# Altium PCB PCB1.PcbDoc
Units mm, origin at the board's own origin, x right, y up, seen from the top; angles counter-clockwise.
Board outline 79.25 x 29.71 mm, 2 copper layers (Top Layer, Bottom Layer); 51 components, 32 nets, 136 pads, 21 vias.
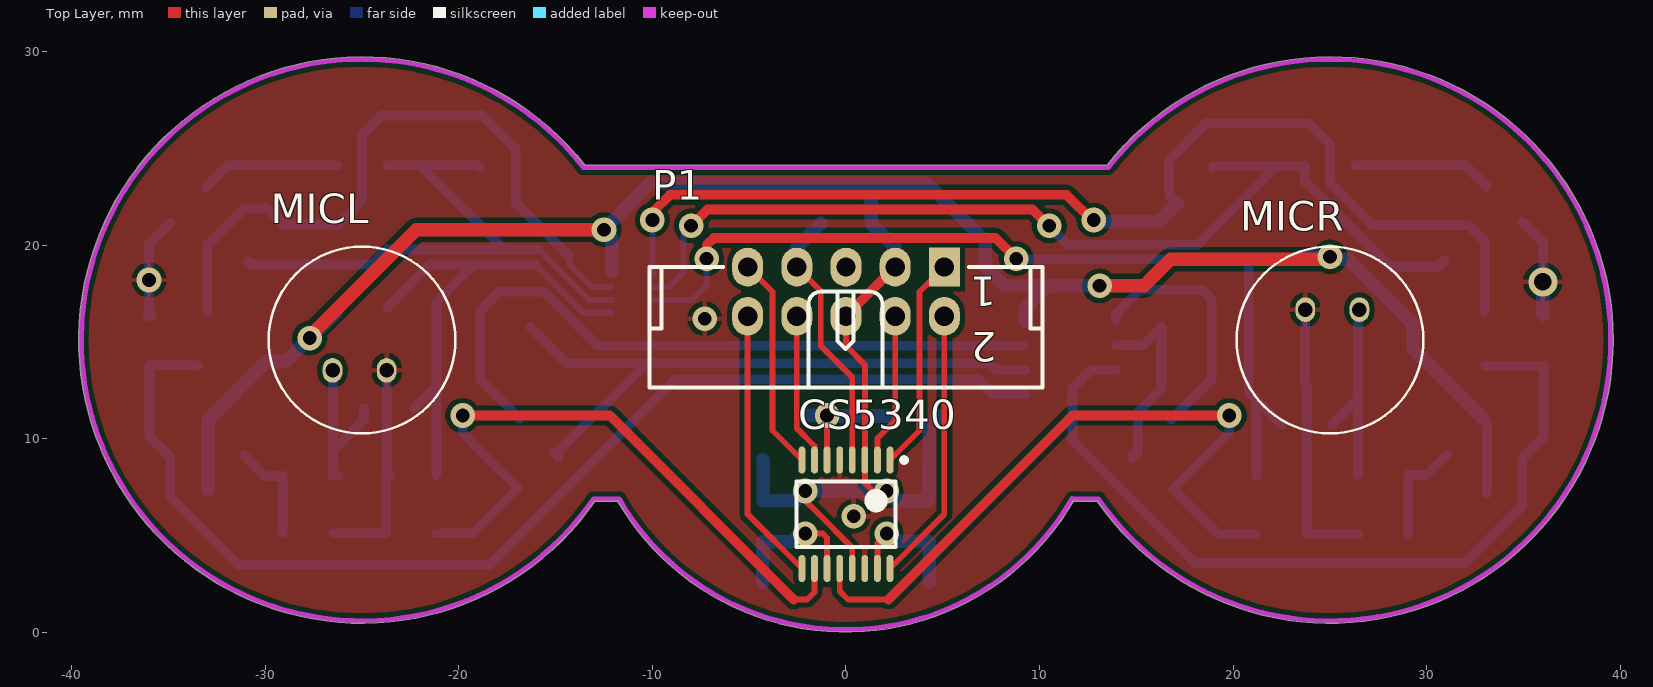
[diagram p0: Top Layer view]
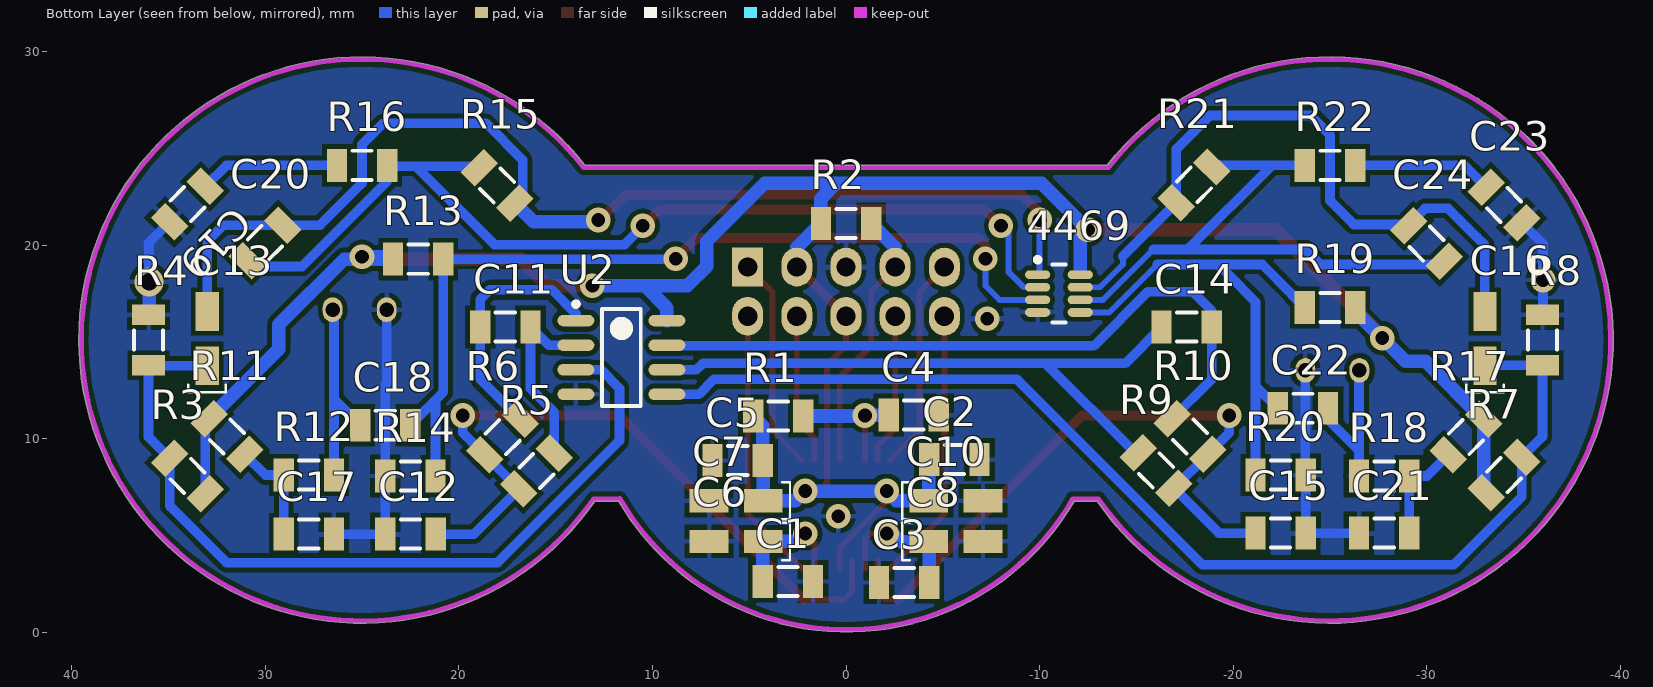
[diagram p1: Bottom Layer view, seen from below]
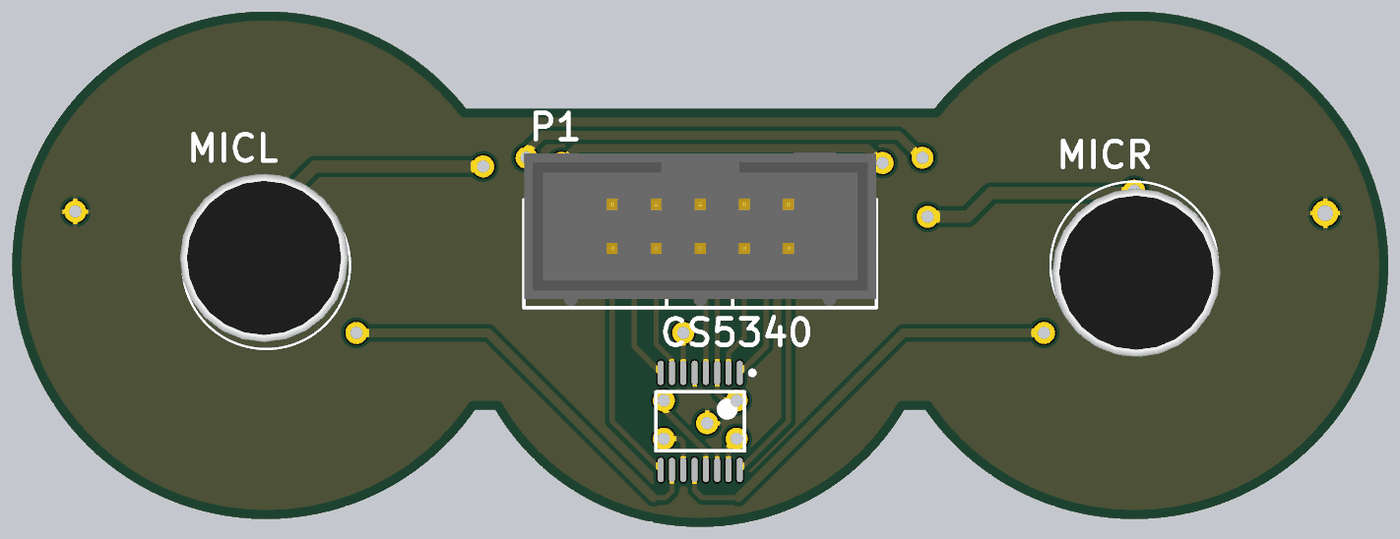
[diagram p2: 3D render of the assembled board from above, using the file's embedded part models]
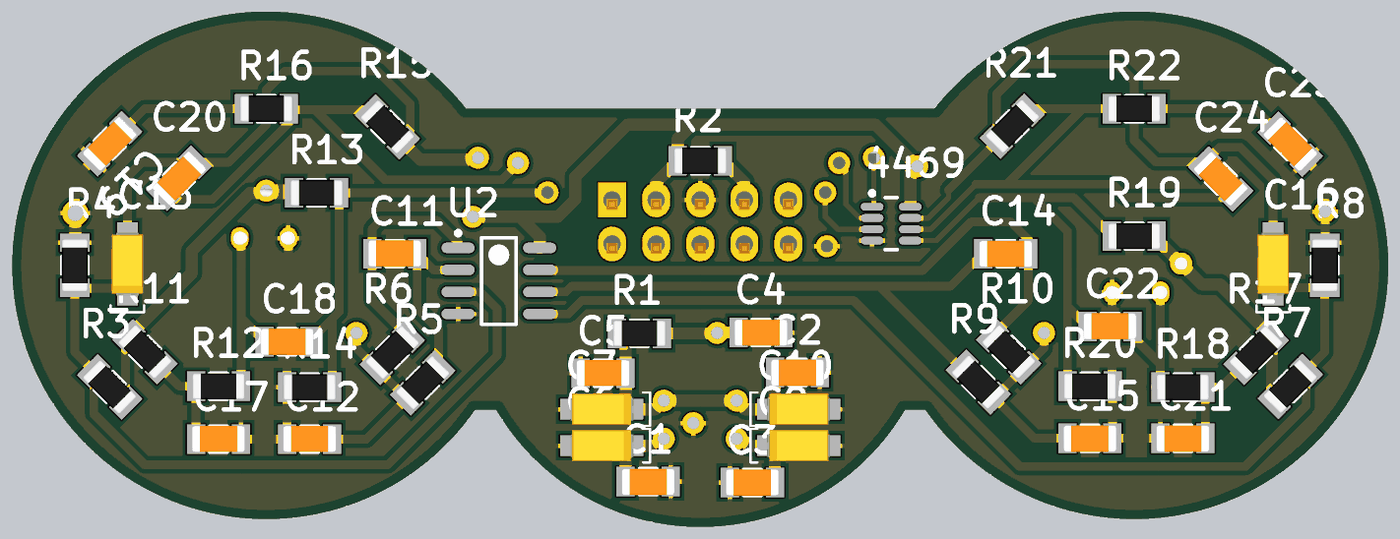
[diagram p3: 3D render of the assembled board from below, using the file's embedded part models]

## Layer stack, top to bottom
Top Solder: solder mask 0.0102, Solder Resist, Dk 3.5
Top Layer: signal copper 0.0356
Dielectric 1: dielectric 0.32, FR-4, Dk 4.8
Bottom Layer: signal copper 0.0356
Bottom Solder: solder mask 0.0102, Solder Resist, Dk 3.5

## Board outline
-12.974,6.773 cw(c-25,15.1) -13.491,24.127 13.499,24.127 cw(c13.619,24.085) 13.519,24.164 cw(c25,15.1) 39.627,15.1 cw(c25,15.1) 12.974,6.773 11.746,6.773 cw(c-0.022,13.644) -11.791,6.773

## Design rules (kind name [scope] priority, off if disabled: settings)
Clearance [All] p1: gap=0.254 ignorepadtopadclearanceinfootprint=TRUE except(0: Arc-Hole Track-Hole SMDPad-Hole THPad-Hole Via-Hole Fill-Hole Poly-Hole Region-Hole Text-Hole)
PolygonConnect [All] p1: connectstyle=Relief reliefconductorwidth=0.254 reliefentries=4 polygonreliefangle="90 Angle" airgapwidth=0.254
RoutingVias [All] p1: holewidth=0.711 width=1.27 viastyle="Through Hole" minholewidth=0.711 minwidth=1.27 maxholewidth=0.711 maxwidth=1.27
SolderMaskExpansion [All] p1: expansion=0.102
UnRoutedNet [All] p1: checkbadconnections=TRUE
Width [All] p1: maxlimit=0.7 minlimit=0.3 preferedwidth=0.5 minimp=50.000000 maximp=50.000000 favimp=50.000000
29 further rules are at their usual default settings.

## Classes and differential pairs
component class PreAmp_ADC: 4469 C1 C2 C3 C4 C5 C6 C8 C10 C12 C13 C14 C15 C16 C17 C18 C19 C21 C22 C23 MICL MICR R1 R2 R3 R4 R5 R6 R7 R8 R9 R10 R11 R12 R13 R14 R15 R16 R17 R18 R19 R20 R21 R22 U2

## Components (designator, comment, footprint, x,y, rotation, side; value= is the part's Value field where it differs from the comment)
4469 "MAX4469EKA+T" SOT23-8_L -11,17.5 r180 bottom
C1 "100nF" SMD_CAP_1206 3,2.6 r180 bottom
C2 "100nF" SMD_CAP_1206 -5.6,8.9 r180 bottom
C3 "100nF" SMD_CAP_1206 -3,2.6 r0 bottom
C4 "100nF" SMD_CAP_1206 -3.5,11.2 r180 bottom
C5 "100nF" SMD_CAP_1206 5.6,8.9 r0 bottom
C6 "1uF" "CAPP 1206 (3216X18L) Size A" 5.6,4.7 r0 bottom
C7 "1uF" "CAPP 1206 (3216X18L) Size A" 5.6,6.8 r0 bottom
C8 "1uF" "CAPP 1206 (3216X18L) Size A" -5.6,4.7 r180 bottom
C10 "1uF" "CAPP 1206 (3216X18L) Size A" -5.6,6.8 r180 bottom
C11 "470pF" SMD_CAP_1206 17.6,15.8 r0 bottom
C12 "2.2nF" SMD_CAP_1206 22.5,5.1 r0 bottom
C13 "4.7uF" "CAPP 1206 (3216X18L) Size A" 33,15.1 r90 bottom
C14 "470pF" SMD_CAP_1206 -17.6,15.75 r180 bottom
C15 "2.2nF" SMD_CAP_1206 -22.45,5.1 r180 bottom
C16 "4.7uF" "CAPP 1206 (3216X18L) Size A" -33,15.1 r90 bottom
C17 "100nF" SMD_CAP_1206 27.75,5.1 r0 bottom
C18 "10nF" SMD_CAP_1206 23.8,10.675 r180 bottom
C19 "1uF" SMD_CAP_1206 34,22.1 r135 bottom
C20 "100pF" SMD_CAP_1206 30,20.1 r135 bottom
C21 "100nF" SMD_CAP_1206 -27.8,5.1 r180 bottom
C22 "10nF" SMD_CAP_1206 -23.6,11.6 r0 bottom
C23 "1uF" SMD_CAP_1206 -34,22.1 r45 bottom
C24 "100pF" SMD_CAP_1206 -30,20.1 r45 bottom
CS5340 "CS5340-CZZ" TSSOP16_L 0,6.1 r270 top
MICL "Electret Microphone 10mm" MIC1 -25,15.1 r0 top
MICR "Electret Microphone 10mm" MIC1 25,15.1 r180 top
P1 "Header 5X2" FKV10LN 0,17.6 r180 top
R1 "5.1" "RES 1206 (3216X08L)" 3.5,11.2 r180 bottom
R2 "10K" "RES 1206 (3216X08L)" 0,21.1 r0 bottom
R3 "100K" "RES 1206 (3216X08L)" 34,8.1 r225 bottom
R4 "100K" "RES 1206 (3216X08L)" 36,15.1 r270 bottom
R5 "634" "RES 1206 (3216X08L)" 16,8.35 r135 bottom
R6 "9.1" "RES 1206 (3216X08L)" 17.75,10.1 r135 bottom
R7 "100K" "RES 1206 (3216X08L)" -34,8.1 r315 bottom
R8 "100K" "RES 1206 (3216X08L)" -36,15.1 r270 bottom
R9 "634" "RES 1206 (3216X08L)" -16,8.35 r45 bottom
R10 "9.1" "RES 1206 (3216X08L)" -17.75,10.1 r45 bottom
R11 "2K" "RES 1206 (3216X08L)" 32,10.1 r45 bottom
R12 "2K" "RES 1206 (3216X08L)" 27.75,8.1 r0 bottom
R13 "1M" "RES 1206 (3216X08L)" 22.1,19.25 r0 bottom
R14 "1M" "RES 1206 (3216X08L)" 22.5,8.1 r180 bottom
R15 "100K" "RES 1206 (3216X08L)" 18,23.1 r225 bottom
R16 "10K" "RES 1206 (3216X08L)" 25,24.1 r0 bottom
R17 "2K" "RES 1206 (3216X08L)" -32,10.1 r135 bottom
R18 "2K" "RES 1206 (3216X08L)" -27.8,8.1 r180 bottom
R19 "1M" "RES 1206 (3216X08L)" -25,16.8 r180 bottom
R20 "1M" "RES 1206 (3216X08L)" -22.45,8.1 r0 bottom
R21 "100K" "RES 1206 (3216X08L)" -18,23.1 r315 bottom
R22 "10K" "RES 1206 (3216X08L)" -25,24.15 r180 bottom
U2 "LM258AD" D008_L 11.6,14.2 r180 bottom

## Footprints (in the part's own frame and the unit in brackets; to place one, negate y for a bottom-side part, rotate by r counter-clockwise, add the part's x,y. Pads: shape width x height; smd on the part's side, far side on the other; paste and mask are expansions set on the pad)
"CAPP 1206 (3216X18L) Size A" [mm]
  rect 1.999x1.199 smd: 1(-1.325,0) 2(1.475,0)
  silkscreen extent -2.71,-0.97 -2.31,0.97, body extent -1.75,-0.9 1.88,0.9, height 1.8
D008_L [mm]
  oval 1.9x0.6 smd: 1(-2.35,1.905) 2(-2.35,0.635) 3(-2.35,-0.635) 4(-2.35,-1.905) 5(2.35,-1.905) 6(2.35,-0.635) 7(2.35,0.635) 8(2.35,1.905)
  silkscreen extent -2.48,-2.5 1,2.88, body extent -2,-2.5 2,2.5, height 1.75
FKV10LN [mm]
  rect 1.6x2 hole 1: 1(-5.08,-1.27)
  oval 1.6x2 hole 1: 2(-5.08,1.27) 3(-2.54,-1.27) 4(-2.54,1.27) 5(0,-1.27) 6(0,1.27) 7(2.54,-1.27) 8(2.54,1.27) 9(5.08,-1.27) 10(5.08,1.27)
  silkscreen extent -10.16,-1.27 10.16,4.95, body extent -10.15,-4 10.15,4.85, height 9.17
MIC1 [mm]
  oval 1.016x1.27 hole 0.75: 1(-1.522,-1.566) 2(1.272,-1.566)
  silkscreen extent -4.83,-4.83 4.83,4.83, body extent -4.97,-4.43 4.73,5.27, height 5.15
"RES 1206 (3216X08L)" [mm]
  rect 1.05x1.7 smd: 1(-1.3,-0.025) 2(1.296,-0.025)
  silkscreen extent -0.5,-0.77 0.5,0.72, body extent -1.53,-0.79 1.52,0.74, height 0.6
SMD_CAP_1206 [mm]
  rect 1.05x1.7 smd: 1(-1.3,0.025) 2(1.296,0.025)
  silkscreen extent -0.5,-0.72 0.5,0.77, body extent -1.52,-0.75 1.52,0.77, height 0.75
SOT23-8_L [mm]
  oval 1.3x0.45 smd: 1(-1.1,0.975) 2(-1.1,0.325) 3(-1.1,-0.325) 4(-1.1,-0.975) 5(1.1,-0.975) 6(1.1,-0.325) 7(1.1,0.325) 8(1.1,0.975)
  silkscreen extent -1.23,-1.5 0.35,1.87, body extent -0.87,-1.5 0.87,1.5, height 1.45
TSSOP16_L [mm]
  oval 1.4x0.35 smd: 1(-2.8,2.275) 2(-2.8,1.625) 3(-2.8,0.975) 4(-2.8,0.325) 5(-2.8,-0.325) 6(-2.8,-0.975) 7(-2.8,-1.625) 8(-2.8,-2.275) 9(2.8,-2.275) 10(2.8,-1.625) 11(2.8,-0.975) 12(2.8,-0.325) 13(2.8,0.325) 14(2.8,0.975) 15(2.8,1.625) 16(2.8,2.275)
  silkscreen extent -2.92,-2.55 1.7,3.13, body extent -2.25,-2.55 2.25,2.55, height 1.1

## Part data
4469: "Low-Cost, Micropower, SC70/SOT23-8, Microphone Preamplifier"
C1 C2 C3 C4 C5 C11 C12 C14 C15 C17 C18 C19 C20 C21 C22 C23 C24: library part Cap-Bipolar, "Bipolar Capacitor", Voltage=100V, Adding Date=1387/12/20, Designer="Saeid Jorablo", Organazation=ControTec
C6 C7 C8 C10 C13 C16: library part Cap-Polar, "Polar Capacitor", Voltage=16V, Adding Date=1387/12/20, Designer="Saeid Jorablo", Organazation=ControTec
CS5340: "ADC, Audio 24 bit 192k Serial 16-TSSOP"
MICL MICR: library part Microphone
P1: "Header, 5-Pin, Dual row", LatestRevisionDate=17-Jul-2002, LatestRevisionNote="Re-released for DXP Platform.", Publisher="Altium Limited"
R1 R2 R5 R9: library part Resistor, "Resistor", Power="1/8 W", Tolerance=1%
R3 R4 R6 R7 R8 R10 R11 R12 R13 R14 R15 R16 R17 R18 R19 R20 R21 R22: library part Resistor, "Resistor", Power="1/8 W", Tolerance=5%
U2: "Dual Operational Amplifier", Code_IPC=SOIC127P600-8, ComponentLink1Description="Manufacturer Link", ComponentLink1URL=http://www.ti.com/, ComponentLink2Description=Datasheet, ComponentLink2URL=http://www-s.ti.com/sc/ds/lm258.pdf, DatasheetVersion=Aug-1988, LatestRevisionDate=13-Apr-2006, LatestRevisionNote="IPC-7351 Footprint Added.", PackageDescription="8-Pin Small Outline Integrated Circuit 1.27 mm Pitch", PackageReference=D008, PackageVersion=Jan-1998, Published=15-Apr-2002, Publisher="Altium Limited"

## Via types
v1: diameter 1.27, hole 0.711, Top Layer to Bottom Layer, 20 vias
v2: diameter 1.5, hole 0.9, Top Layer to Bottom Layer, 1 vias

## Nets (pads, with @x,y where several pads share a name; then routed paths per layer and width w, separated by ;. In a path a pad name is that pad's centre, name@x,y a point inside that pad or via, vN(x,y) a via of type N, cw(c..) or ccw(c..) an arc to the next point about the centre after c; other vN are vias at no path point)
AINL: C15.1 CS5340.10 R9.1 R10.1 | length 34
  Top Layer w0.3: -2.7,1.7 -2,1.7 -1.625,2.075 CS5340.10 CS5340.10@-1.625,3.7
  Top Layer w0.5: v1(-19.8,11.2) -12.2,11.2 -2.7,1.7
  Bottom Layer w0.5: C15.1 -19.26,5.125 R9.1 R10.1 -19.8,10.312 v1(-19.8,11.2)
AINR: C12.1 CS5340.12 R5.1 R6.1 | length 36.1
  Top Layer w0.3: CS5340.12@-0.325,3.7 CS5340.12 -0.325,2.125 0.1,1.7 2.2,1.7
  Top Layer w0.5: 2.2,1.7 11.7,11.2 v1(19.8,11.2)
  Bottom Layer w0.5: v1(19.8,11.2) 19.8,10.312 R6.1 16.894,7.406 19.225,5.075 C12.1
FILT+: C1.1 C6.1 CS5340.15 | length 5.6
  Top Layer w0.3: CS5340.15 1.625,4.625 v1(2.1,5.1)
  Bottom Layer w0.7: 2.8,4.7 C6.1 4.3,4.675 C1.1
GND: 4469.4 C1.2 C2.2 C3.2 C4.2 C5.2 C6.2 C7.2 C8.2 C10.2 C12.2 C15.2 C17.1 C19.1 C21.1 C23.1 CS5340.5 CS5340.14 MICL.2 MICR.2 P1.5 R4.1 R8.1 R14.1 R20.1 U2.4 | length 35.9
  Bottom Layer w0.5: R8.1@-36,16.425 v1(-36,18.2) -36,20.065 C23.1 ; C21.1 C15.2 -23.746,8.121 R20.1 ; R20.1@-23.728,8.197 MICL.2 ; R20.1@-23.546,8.079 R20.1@-23.546,8.121 ; MICR.2 23.728,12.872 23.796,12.804 C12.2 C17.1 ; C19.1 36.025,20.11 36,20.085 v2(36,18.1)
  Bottom Layer w0.7: R8.1@-36,16.425 R8.1 ; v2(36,18.1) 36,16.425 R4.1
  other v1: 0.4,6 -7.3,16.2
INB+: 4469.5 C22.2 R19.1 R20.2 | length 26.9
  Bottom Layer w0.3: -16.075,19 -13.6,16.525 4469.5
  Bottom Layer w0.5: R19.1 -23.038,17.437 -23.038,17.462 -21.5,19 -19.2,19 ; C22.2 -21.154,12.725 ; R20.2 -21.154,12.725 ; -16.075,19 -19.2,19 ; -21.154,12.725 -21.154,17.067 -19.721,18.5 -19.7,18.5 -19.2,19
INB-: 4469.6 C24.1 R21.1 R22.1 | length 31.3
  Bottom Layer w0.3: -15.875,19.775 -13.275,17.175 4469.6
  Bottom Layer w0.5: C24.1 -30.738,19 -24.5,19 -23.725,19.775 -17.65,19.775 ; R22.1 -22,24.125 ; R21.1 -18.99,24.125 -22,24.125 ; -15.875,19.775 -17.65,19.775 ; -22,24.125 -17.65,19.775
Left_MIC: 4469.7 C16.2 C24.2 R21.2 | length 35.3
  Bottom Layer w0.3: -14.3,19.435 -14.3,19 -13.125,17.825 4469.7
  Bottom Layer w0.5: C16.2 -33,20 -32.6,20.4 -31.1,21.9 -29.9,21.9 -29.066,21.066 -26.234,21.066 -25,22.3 -25,25.7 -24,26.7 -18.8,26.7 -17.066,24.966 R21.2 -14.3,19.435
LRCK: CS5340.8 P1.9 | length 11.1
  Top Layer w0.3: P1.9 -3.8,17.59 -3.8,10.425 CS5340.8
M0: CS5340.1 P1.1 | length 11.1
  Top Layer w0.3: CS5340.1 3.8,10.425 3.8,17.59 P1.1
M1: CS5340.16 P1.2 | length 14.2
  Top Layer w0.3: CS5340.16 5.08,6.105 P1.2
MCLK: CS5340.2 P1.4 | length 7.8
  Top Layer w0.3: CS5340.2 1.625,10.025 2.54,10.94 P1.4
Net4469_2: 4469.2 C20.1 R15.1 R16.1 | length 52.2
  Top Layer w0.5: v1(-8,21) -7.154,21.846 9.627,21.846 v1@10.487,20.987
  Bottom Layer w0.3: 4469.2 -9.175,17.825 -8.4,18.6 -8.4,20.7 -8.1,21 v1(-8,21)
  Bottom Layer w0.5: v1@10.5,20.973 11.444,20.029 18.154,20.029 22.2,24.075 ; R15.1 19.01,24.075 22.2,24.075 ; R16.1 R16.1@23.7,24.075 ; C20.1 30.898,19.198 30.6,18.9 28.1,18.9 23.7,23.3 R16.1@23.7,24.075 ; 22.2,24.075 R16.1@23.7,24.075
  other v1: 10.5,21
Net4469_3: 4469.3 C18.2 R13.1 R14.2 | length 47.5
  Top Layer w0.5: v1@-7.2,18.9 -7.2,19.2 v1@-7.15,19.25 ; v1(-7.2,19.3) -7.2,20 -6.826,20.374 7.726,20.374 v1(8.8,19.3)
  Bottom Layer w0.3: 4469.3 -7.925,17.175 -7.2,17.9 v1(-7.2,19.3)
  Bottom Layer w0.5: v1@8.55,19.3 v1(8.8,19.3) ; v1@8.8,19.275 R13.1 20.8,12.404 21.204,12 ; R14.2 21.204,12 ; C18.2 21.204,12
NetC11_1: C11.1 R5.2 U2.2 | length 10
  Bottom Layer w0.5: U2.2 15.36,14.835 C11.1 16.3,12.6 15.066,11.366 R5.2 ; R5.2@14.816,8.999 R5.2@14.816,9.249
NetC11_2: C11.2 R6.2 U2.1 | length 13.1
  Bottom Layer w0.5: U2.1 13.95,16.45 15.2,17.7 18.4,17.7 18.896,17.204 C11.2 18.896,13.079 R6.2
NetC13_1: C13.1 R3.1 R4.2 U2.3 | length 43.2
  Bottom Layer w0.5: U2.3 12.665,13.565 11.7,12.6 11.7,9.9 18,3.6 32,3.6 34.75,6.35 34.937,6.537 R3.1 36.025,10.09 R4.2 35.996,13.775 C13.1
NetC14_1: C14.1 R9.2 U2.6 | length 33.4
  Bottom Layer w0.5: C14.1 -14.425,13.9 -10.3,13.9 ; R9.2 -14.916,9.284 -10.3,13.9 ; R9.2@-14.851,9.034 R9.2@-14.851,9.284 ; U2.6 7.735,13.565 7.4,13.9 -10.3,13.9
NetC14_2: C14.2 R10.2 U2.7 | length 36.1
  Bottom Layer w0.5: R10.2 -18.896,13.079 C14.2 -18.896,16.604 -17.9,17.6 -15.6,17.6 -12.8,14.8 U2.7@9.185,14.8
NetC16_1: C16.1 R7.1 R8.2 U2.5 | length 59.6
  Bottom Layer w0.5: C16.1@-33.5,13.775 -33.529,13.804 R8.2 -35.975,10.11 R7.1 -34.902,7.002 -31.4,3.5 -18.4,3.5 -8.833,13.067 6.833,13.067 7.605,12.295 U2.5
NetC17_2: C17.2 R11.1 R12.2 | length 5.5
  Bottom Layer w0.5: C17.2 R12.2 29.99,8.125 R11.1
NetC18_1: C18.1 MICR.1 R12.1 | length 10.5
  Bottom Layer w0.5: C18.1 26.45,12.05 ; R12.1 26.45,12.05 ; MICR.1 26.45,16.594 26.45,12.05
NetC19_2: C19.2 R16.2 | length 7.3
  Bottom Layer w0.5: R16.2 32.01,24.125 C19.2
NetC21_2: C21.2 R17.1 R18.2 | length 5.4
  Bottom Layer w0.5: R17.1 -30.01,8.075 R18.2 C21.2
NetC22_1: C22.1 MICL.1 R18.1 | length 8.3
  Bottom Layer w0.5: MICL.1 -26.5,13.512 -26.5,9.4 ; R18.1 -26.5,9.4 ; C22.1 -24.9,11 -26.5,9.4
NetC23_2: C23.2 R22.2 | length 7.2
  Bottom Layer w0.5: C23.2 -31.94,24.125 R22.2
Right_MIC: 4469.1 C13.2 C20.2 R15.2 | length 58.5
  Top Layer w0.5: v1@-10,21.1 v1(-10,21.3) -10,21.7 -9.1,22.6 11.4,22.6 v1@12.8,21.2
  Bottom Layer w0.3: v1@-10,21.1 -10,18.575 4469.1
  Bottom Layer w0.5: R15.2 16.7,22.567 16.7,24.4 18.6,26.3 23.9,26.3 25,25.2 25,23.2 27.166,21.034 C20.2 32.166,21.034 32.4,20.8 33,20.2 C13.2
  Bottom Layer w0.7: v1@12.8,21.2 16.135,21.2 R15.2
  other v1: 12.8,21.3
RST: CS5340.9 P1.10 | length 14.2
  Top Layer w0.3: P1.10 -5.08,6.105 CS5340.9
SCLK: CS5340.7 P1.8 | length 7.8
  Top Layer w0.3: P1.8 -2.54,10.54 -1.625,9.625 CS5340.7
SDOUT: CS5340.4 P1.7 R2.1 | length 13.9
  Top Layer w0.3: P1.7 -1.3,17.63 -1.3,14.8 0.325,13.175 CS5340.4
  Bottom Layer w0.7: P1.7 -2.54,19.885 R2.1
VA: 4469.8 C2.1 C5.1 C7.1 C10.1 CS5340.3 CS5340.13 P1.3 P1.6 R1.1 R2.2 R3.2 R7.2 R11.2 R13.2 R17.2 R19.2 U2.8 | length 136
  Top Layer w0.3: v1(-2.1,7.3) -2.1,6.8 -1.5,6.2 0.325,4.375 CS5340.13 ; P1.6 0,14.8 0.975,13.825 CS5340.3 0.975,7.725 1.4,7.3 v1(2.1,7.3) ; v1@2.1,7.2 v1@2.2,7.2
  Top Layer w0.5: P1.6 P1.3
  Top Layer w0.7: v1(-27.7,15.2) -27.7,15.3 -22.2,20.8 v1(-12.5,20.8) ; v1(13.1,17.9) 15.4,17.9 15.8,18.3 16.775,19.275 24.875,19.275 v1(25,19.4)
  Bottom Layer w0.5: R11.2 33.101,10.832 R3.2
  Bottom Layer w0.7: R7.2@-32.934,7.333 R17.2 -29.933,14 -28.9,14 R19.2@-26.296,16.604 ; 4469.8@-12.1,18.654 -12.1,20.4 v1(-12.5,20.8) -10.1,23.2 0.5,23.2 ; C2.1 -4.275,8.9 C10.1 -2.6,6.8 v1(-2.1,7.3) v1(2.1,7.3) 2.6,6.8 C7.1 4.275,8.85 C5.1 4.3,10.675 R1.1 ; P1.3 2.54,19.881 R2.2 1.296,22.404 0.5,23.2 ; U2.8 9.25,16.75 10.4,17.9 ; v1(13.1,17.9) 10.4,17.9 ; v1(25,19.4) 23.521,19.4 R13.2 25.925,19.275 29.3,15.9 29.3,14.633 R11.2 ; 0.5,23.2 4.2,23.2 7.2,20.2 7.2,18.9 8.2,17.9 10.4,17.9
VD: C4.1 CS5340.6 R1.2 | length 6.7
  Top Layer w0.3: CS5340.6 v1(-0.975,11.2)
  Bottom Layer w0.7: C4.1 -1,11.225 v1(-0.975,11.2) -0.95,11.175 R1.2
VQ: C3.1 C8.1 CS5340.11 | length 7.3
  Top Layer w0.3: v1(-2.1,5.1) -1.2,5.1 -0.975,4.875 CS5340.11
  Bottom Layer w0.7: C3.1 -4.3,4.675 -2.825,4.675 -2.4,5.1 v1(-2.1,5.1)

## Polygon pours and split planes (outlines as drawn)
GND on Bottom Layer "GND_L02_P080" (solid, remove dead copper, pour order 80): 40,30 40,0 -40,0 -40,30
GND on Top Layer "GND_L01_P082" (solid, remove dead copper, pour order 82): 40,30 40,0 -40,0 -40,30

## Keep-outs
Keep-Out Layer:
  lines w0.254: -13.571,24 13.534,24 13.619,24.085 cw(c25,15.1) 13.044,6.896 ; -13.571,24.023 ccw(c-25,15.1) -13.044,6.896 ; -13.05,6.9 -11.71,6.9 ; -11.713,6.893 ccw(c-0.022,13.644) 11.682,6.916 ; 11.71,6.9 13.05,6.9

## Text inside footprints (layer, text, board x,y; h text height)
P1: Top Overlay "2" at 7.798,15.492 h1.52 r180; Top Overlay "1" at 7.772,18.362 h1.52 r180